# EAGLE board main (EAGLE 9.0.1)
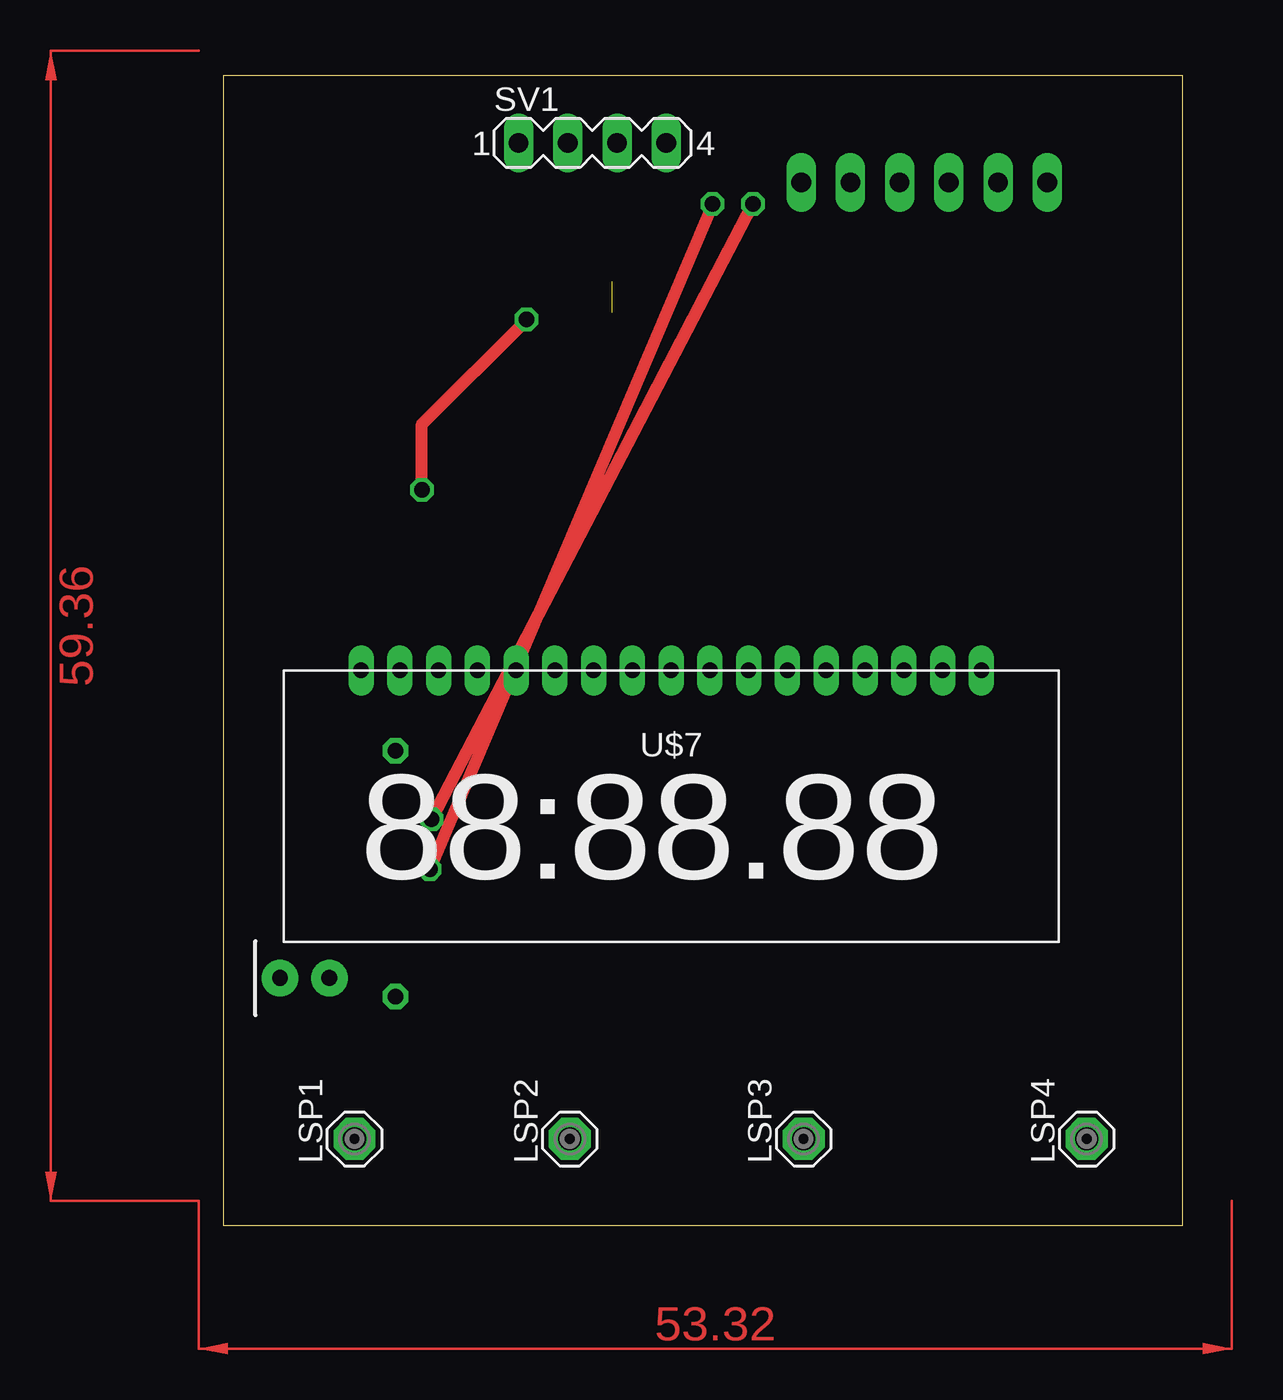
[diagram p0: board, top side]
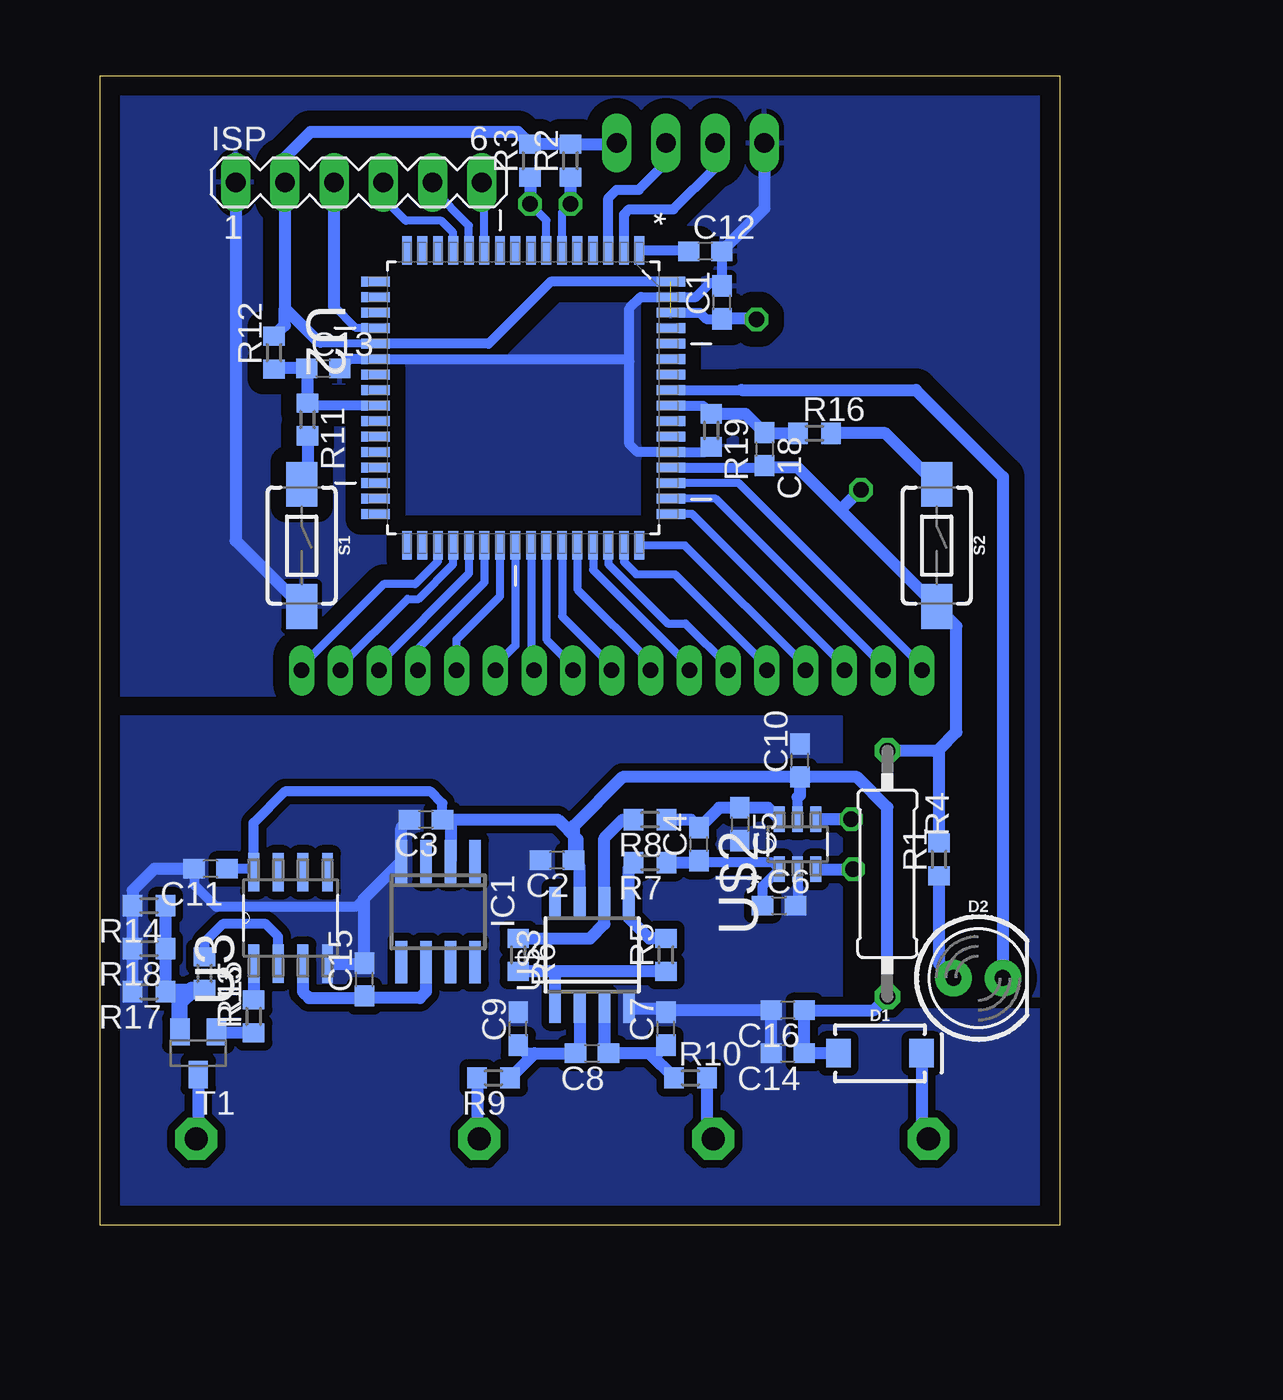
[diagram p1: board, bottom side, seen from below]

Size 49.51 x 59.36 mm. Coordinates in mm from the lower left corner, seen from the top.
Outline: 0,0 49.51,0 49.51,59.36 0,59.36 0,0
Copper layers (1*16): Top 0.035mm / dielectric 1.5mm / Bottom 0.035mm
Design rules "default *": minimum track width 16mil, minimum drill 0.35mm, track to track 10mil, track to pad 10mil, pad to pad 10mil, via to via 10mil, smd to smd 10mil, copper to edge 40mil, drill to drill 6mil, minimum pad ring 10mil, minimum via ring 8mil, stop-mask expansion 4mil, vias tented up to drill 0mil, thermal gap 10mil

## Footprints (pad centres in the part's own frame; a part is rotated, then mirrored left to right if it is on the bottom)
C0603 = smd 1.1 x 1: 1 -0.85,0; 2 0.85,0
SMA-DIODE = smd 1.27 x 1.47: A -2.15,0; C 2.15,0
LED_5MM = drill 0.813 pad 1.88: A -1.27,0; K 1.27,0
SOIC8 = smd 0.6 x 2.2: 1 -1.905,-2.6; 2 -0.635,-2.6; 3 0.635,-2.6; 4 1.905,-2.6; 5 1.905,2.6; 6 0.635,2.6; 7 -0.635,2.6; 8 -1.905,2.6
MA06-1 = drill 1.016 long: 1 -6.35,0; 2 -3.81,0; 3 -1.27,0; 4 1.27,0; 5 3.81,0; 6 6.35,0
MCS08 = drill 1.194 pad 2.159 octagon: MP 0,0
R0603 = smd 1 x 1.1: 1 -0.85,0; 2 0.85,0
0309/12 = drill 0.813 octagon: 1 -6.35,0; 2 6.35,0
TACTILE_SWITCH_SMD_6.0X3.5MM = smd 2.3 x 1.6: 1 -3.15,0; 2 3.15,0
MA04-1 = drill 1.016 long: 1 -3.81,0; 2 -1.27,0; 3 1.27,0; 4 3.81,0
SOT23-BEC = smd 1 x 1.4: B -0.95,-1.1; C 0,1.1; E 0.95,-1.1
QFP80P1600X1600X120-64N = smd 1.473 x 0.508: 1 -7.62,5.994; 2 -7.62,5.207; 3 -7.62,4.394; 4 -7.62,3.607; 5 -7.62,2.794; 6 -7.62,2.007; 7 -7.62,1.194; 8 -7.62,0.406; 9 -7.62,-0.406; 10 -7.62,-1.194; 11 -7.62,-2.007; 12 -7.62,-2.794; 13 -7.62,-3.607; 14 -7.62,-4.394; 15 -7.62,-5.207; 16 -7.62,-5.994; 33 7.62,-5.994; 34 7.62,-5.207; 35 7.62,-4.394; 36 7.62,-3.607; 37 7.62,-2.794; 38 7.62,-2.007; 39 7.62,-1.194; 40 7.62,-0.406; 41 7.62,0.406; 42 7.62,1.194; 43 7.62,2.007; 44 7.62,2.794; 45 7.62,3.607; 46 7.62,4.394; 47 7.62,5.207; 48 7.62,5.994 | smd 0.508 x 1.473: 17 -5.994,-7.62; 18 -5.207,-7.62; 19 -4.394,-7.62; 20 -3.607,-7.62; 21 -2.794,-7.62; 22 -2.007,-7.62; 23 -1.194,-7.62; 24 -0.406,-7.62; 25 0.406,-7.62; 26 1.194,-7.62; 27 2.007,-7.62; 28 2.794,-7.62; 29 3.607,-7.62; 30 4.394,-7.62; 31 5.207,-7.62; 32 5.994,-7.62; 49 5.994,7.62; 50 5.207,7.62; 51 4.394,7.62; 52 3.607,7.62; 53 2.794,7.62; 54 2.007,7.62; 55 1.194,7.62; 56 0.406,7.62; 57 -0.406,7.62; 58 -1.194,7.62; 59 -2.007,7.62; 60 -2.794,7.62; 61 -3.607,7.62; 62 -4.394,7.62; 63 -5.207,7.62; 64 -5.994,7.62
SOIC127P600X175-8N = smd 1.981 x 0.559: 1 -2.362,1.905; 2 -2.362,0.635; 3 -2.362,-0.635; 4 -2.362,-1.905; 5 2.362,-1.905; 6 2.362,-0.635; 7 2.362,0.635; 8 2.362,1.905
SOT95P270X145-6N = smd 1.321 x 0.559: 1 -1.295,0.94; 2 -1.295,0; 3 -1.295,-0.94; 4 1.295,-0.94; 5 1.295,0; 6 1.295,0.94
SOIC8' = smd 0.6 x 1.5: 1 -1.905,-2.75; 2 -0.635,-2.75; 3 0.635,-2.75; 4 1.905,-2.75; 5 1.905,2.75; 6 0.635,2.75; 7 -0.635,2.75; 8 -1.905,2.75
GDC0570_LCD = drill 0.8 long: P$1 -16,0; P$2 -14,0; P$3 -12,0; P$4 -10,0; P$5 -8,0; P$6 -6,0; P$7 -4,0; P$8 -2,0; P$9 0,0; P$10 2,0; P$11 4,0; P$12 6,0; P$13 8,0; P$14 10,0; P$15 12,0; P$16 14,0; P$17 16,0

## Placement (x,y rotation side)
C1  100n  [C0603]  17.42,47.65 90 bottom
C2  100n  [C0603]  25.93,18.86 180 bottom
C3  100n  [C0603]  32.7,20.96 180 bottom
C4  1u  [C0603]  18.61,19.68 90 bottom
C5  1u  [C0603]  16.51,20.71 270 bottom
C6  100n  [C0603]  14.48,16.51 0 bottom
C7  10n  [C0603]  20.32,10.16 90 bottom
C8  100n  [C0603]  24.13,8.89 180 bottom
C9  10n  [C0603]  27.94,10.16 90 bottom
C10  1u  [C0603]  13.4,24 90 bottom
C11  100n  [C0603]  43.82,18.42 180 bottom
C12  1u  [C0603]  18.29,50.29 0 bottom
C13  100n  [C0603]  38,44.25 0 bottom
C14  1u  [C0603]  14.03,8.89 180 bottom
C15  1u  [C0603]  35.88,12.7 90 bottom
C16  100n  [C0603]  14.03,11.11 180 bottom
C18  100n  [C0603]  15.24,40.08 270 bottom
D1  1A/40V/500mV  [SMA-DIODE]  9.27,8.89 0 bottom
D2  [LED_5MM]  4.2,12.78 0 bottom
IC1  LT1019S-2.5  [SOIC8]  32.07,16.19 180 bottom
ISP  [MA06-1]  36.17,53.85 0 bottom
LSP1  MCS08  [MCS08]  6.77,4.47 90 top
LSP2  MCS08  [MCS08]  17.88,4.47 90 top
LSP3  MCS08  [MCS08]  29.95,4.47 90 top
LSP4  MCS08  [MCS08]  44.55,4.47 90 top
R1  470  [R0603]  6.22,18.9 90 bottom
R2  4.7k  [R0603]  25.25,54.97 90 bottom
R3  4.7k  [R0603]  27.33,54.97 90 bottom
R4  0  [0309/12]  8.89,18.16 270 bottom
R5  18k  [R0603]  20.32,13.97 90 bottom
R6  2k  [R0603]  27.94,13.97 270 bottom
R7  20k  [R0603]  21.15,18.73 180 bottom
R8  20k  [R0603]  21.15,20.96 180 bottom
R9  1k  [R0603]  29.21,7.62 180 bottom
R10  1k  [R0603]  19.05,7.62 0 bottom
R11  1k  [R0603]  38.81,41.61 270 bottom
R12  10k  [R0603]  40.54,45.06 90 bottom
R13  1k  [R0603]  41.59,10.79 90 bottom
R14  100  [R0603]  46.99,16.51 180 bottom
R15  1k  [R0603]  44.13,13.02 270 bottom
R16  1k  [R0603]  12.65,40.89 0 bottom
R17  100  [R0603]  46.99,12.07 180 bottom
R18  100  [R0603]  46.99,14.29 180 bottom
R19  10k  [R0603]  17.98,41.05 270 bottom
S1  MOMENTARY-SWITCH-SPST-SMD-6.0X3.5MM  [TACTILE_SWITCH_SMD_6.0X3.5MM]  39.12,35.1 270 bottom
S2  MOMENTARY-SWITCH-SPST-SMD-6.0X3.5MM  [TACTILE_SWITCH_SMD_6.0X3.5MM]  6.35,35.1 270 bottom
SV1  [MA04-1]  19.05,55.88 0 top
T1  [SOT23-BEC]  44.45,8.89 180 bottom
U2  ATMEGA169P-16AU  [QFP80P1600X1600X120-64N]  27.69,42.72 270 bottom
U3  MCP6V02-E/SN  [SOIC127P600X175-8N]  39.69,15.88 90 bottom
U$2  MCP3421A0T-E/CH  [SOT95P270X145-6N]  13.53,19.68 90 bottom
U$3  MCP6N11  [SOIC8']  24.13,13.97 0 bottom
U$7  GDC0570_LCD  [GDC0570_LCD]  23.11,28.65 180 top

## Library data of the parts
C1-C16 C18 = rcl; SPICEPREFIX: C
D1 = SparkFun-DiscreteSemi; PROD_ID: DIO-08053
D2 = SparkFun-LED
IC1 = linear-technology; MPN: LT1019CS8-2.5#PBF; OC_FARNELL: 9559426; OC_NEWARK: 57M0929
ISP SV1 = con-lstb; OC_FARNELL: unknown; OC_NEWARK: unknown
LSP1-LSP4 = solpad
R1-R19 = rcl; SPICEPREFIX: R
S1 S2 = SparkFun-Switches; PROD_ID: SWCH-00815; SF_SKU: COM-08229
T1 = DC_LOAD_AU
U2 = 7_segment_lib; MPN: ATMEGA169P-16AU; OC_FARNELL: 1675975; OC_NEWARK: 33P6478; PACKAGE: TQFP-64; SUPPLIER: Atmel
U3 = Microchip_By_element14_Batch_1; MPN: MCP6V02-E/SN; OC_FARNELL: 1629346; OC_NEWARK: 27M0220; PACKAGE: SOIC-8; SUPPLIER: Microchip
U$2 = Microchip_By_element14_Batch_1; MPN: MCP3421A0T-E/CH; OC_FARNELL: 1605567; OC_NEWARK: 77M2561; PACKAGE: SOT-6; SUPPLIER: Microchip
U$3 U$7 = 7_segment_lib

## Nets
1: U2.47 U$7.P$13
2: U2.46 U$7.P$12
3: U2.45 U$7.P$11
4: U2.44 U$7.P$10
5: U2.43 U$7.P$9
6: U2.42 U$7.P$8
7: U2.41 U$7.P$7
8: U2.40 U$7.P$6
9: U2.39 U$7.P$5
10: U2.38 U$7.P$4
11: U2.37 U$7.P$3
12: U2.36 U$7.P$2
13: U2.35 U$7.P$1
ADCIN+: C4.1 C6.1 R7.1 U$2.1
ADCIN-: C4.2 C5.1 R8.1 U$2.6
B2: C18.1 R16.1 R19.1 U2.56
COM1: U2.51 U$7.P$17
COM2: U2.50 U$7.P$16
COM3: U2.49 U$7.P$15
COM4: U2.48 U$7.P$14
GND: C1.2 C12.2 C13.2 ISP.1 R19.2 S1.2 SV1.1 U2.22 U2.53 U2.63
GNDA: C2.2 C3.2 C5.2 C6.2 C7.2 C9.2 C10.2 C11.2 C14.2 C15.2 C16.2 IC1.4 R14.2 R17.2 R18.2 U3.4 U$2.2 U$3.4
HOLD: C13.1 R11.1 R12.1 U2.25
LCDCAP: C12.1 U2.1
LED: D2.K U2.57
MISO: ISP.4 U2.13
MOSI: ISP.5 U2.12
N1: R11.2 S1.1
N2: R16.2 S2.1
N$2: C15.1 IC1.6 U3.3
N$3: R14.1 R15.2 R17.1 R18.1 T1.E
N$4: C8.2 C9.1 R9.1 U$3.2
N$5: C7.1 C8.1 R10.1 U$3.3
N$6: D2.A R1.1
N$7: R13.2 U3.1
N$8: R13.1 T1.B
N$9: R15.1 U3.2
PB0: U2.10
PB4: U2.14
PB5: U2.15
PB6: U2.16
PB7: U2.17
PD1: U2.26
PD2: U2.27
PD3: U2.28
PD4: U2.29
PD5: U2.30
PD6: U2.31
PD7: U2.32
PE2: U2.4
PE3: U2.5
PE6: U2.8
PE7: U2.9
PF0: U2.61
PF1: U2.60
PF2: U2.59
PF3: U2.58
PF6: U2.55
PF7: U2.54
PG0: U2.33
PG1: U2.34
PG3: U2.18
PG4: U2.19
RESET: ISP.3 U2.20
RX: SV1.2 U2.2
S+: LSP2.MP R10.2
S-: LSP3.MP R9.2
SCK: ISP.6 U2.11
SCL: R2.1 U2.6 U$2.3
SDA: R3.1 U2.7 U$2.4
TX: SV1.3 U2.3
V+: D1.C LSP1.MP
V-: LSP4.MP T1.C
VCC: C1.1 C18.2 ISP.2 R1.2 R2.2 R3.2 R4.1 R12.2 S2.2 SV1.4 U2.21 U2.52 U2.62 U2.64
VCCA: C2.1 C3.1 C10.1 C11.1 C14.1 C16.1 D1.A IC1.2 R4.2 U3.8 U$2.5 U$3.7
VFG: R5.1 R6.2 U$3.1
VOUT: R6.1 R8.2 U$3.6
VREF: R5.2 R7.2 U$3.5

## Tracks (layer width: path | path; a pad name or v marks a point on that pad's centre or on a via)
1
  Bottom 0.406: U2.47 22.48,34.25 21.85,33.62 19.86,33.62 15.11,28.88 U$7.P$13
2
  Bottom 0.406: U2.46 23.29,34.13 20.24,31.08 19.31,31.08 17.11,28.88 U$7.P$12
3
  Bottom 0.406: U2.45 24.08,33.84 19.11,28.88 U$7.P$11
4
  Bottom 0.406: U2.44 24.89,32.83 21.11,29.06 U$7.P$10
5
  Bottom 0.406: U2.43 25.68,31.44 23.11,28.88 U$7.P$9
6
  Bottom 0.406: U2.42 26.49,30.25 25.11,28.88 U$7.P$8
7
  Bottom 0.406: U2.41 27.28,28.82 U$7.P$7
8
  Bottom 0.406: U2.40 28.09,29.93 29.38,28.65 U$7.P$6
9
  Bottom 0.406: U$7.P$5 31.11,30.25 28.88,32.49 U2.39
10
  Bottom 0.406: U2.38 29.69,33.19 33.11,29.77 U$7.P$4
11
  Bottom 0.406: U2.37 30.48,33.66 35.11,29.02 U$7.P$3
12
  Bottom 0.406: U$7.P$2 37.11,28.88 33.65,32.34 33.08,32.34 31.29,34.13 U2.36
13
  Bottom 0.406: U2.35 32.08,34.28 33.26,33.1 34.89,33.1 39.11,28.88 U$7.P$1
ADCIN+
  Bottom 0.508: 18.92,18.73 14.81,18.73 U$2.1 15.33,17.53 C6.1
  Bottom 0.61: R7.1 18.92,18.73 18.71,18.73 C4.1
ADCIN-
  Bottom 0.508: U$2.6 14.49,20.96
  Bottom 0.61: 20.35,21.01 R8.1 19.03,20.96 C4.2 17.58,21.56 C5.1 15.05,21.56 U$2.6
B2
  Bottom 0.508: U2.56 18.4,42.32 R19.1
  Bottom 0.61: R16.1 15.2,40.89 C18.1 16.21,41.9 R19.1
COM1
  Bottom 0.406: U$7.P$17 7.11,28.88 16.57,38.33 U2.51
COM2
  Bottom 0.406: U$7.P$16 9.11,28.88 17.75,37.52 U2.50
COM3
  Bottom 0.406: U$7.P$15 11.11,28.88 18.97,36.73 U2.49
COM4
  Bottom 0.406: U$7.P$14 13.11,28.88 19.34,35.1 U2.48
GND
  Bottom 0.508: C13.2 36.67,44.73 U2.22 22.33,44.73 22.2,44.6 | R19.2 18.3,39.93 U2.53 21.79,39.93 22.2,40.34 22.2,44.6 | 22.2,44.6 22.2,47.35 21.62,47.93 U2.63 18.77,47.93 18.03,48.67 17.59,48.67 17.44,48.51 | C12.2 17.44,48.51 | 17.44,48.51 C1.2
  Bottom 0.61: 42.52,55.12 ISP.1 42.52,35.36 S1.2 | SV1.1 15.24,52.49 C12.2
  pour Bottom (isolate 0.813): -1.27,60.6 52.07,60.6 52.07,27.33 8.26,27.33 8.26,11.91 -1.27,11.79
GNDA
  Bottom 0.508: C6.2 13.53,16.61 U$2.2 | C11.2 44.67,17.59 43.54,16.46 36.31,16.46 35.92,16.85
  Bottom 0.61: U3.4 35.92,13.51 | 35.92,13.51 C15.2 | 35.92,13.51 35.92,16.85 IC1.4 33.97,20.54 C3.2 | R17.2 R18.2 R14.2 47.84,17.29 46.71,18.42 C11.2 | U$3.4 20.53,11.22 | 20.53,11.22 C7.2 | C14.2 C16.2 20.42,11.11 20.53,11.22
  pour Bottom (isolate 0.406, no thermals): 52.02,26.29 52.02,0 -1.27,0 -1.27,11.18 11.23,11.18 11.23,26.29
HOLD
  Bottom 0.508: U2.25 38.67,42.32 R11.1
  Bottom 0.61: R12.1 40.5,44.25 C13.1 38.81,44.21 R11.1
LCDCAP
  Bottom 0.508: U2.1 19.19,50.34 C12.1
LED
  Bottom 0.508: U2.57 16.41,43.13
  Bottom 0.61: D2.K 2.93,38.65 7.42,43.13 16.41,43.13
MISO
  Bottom 0.406: U2.13 31.29,51.26 31.9,51.87 33.73,51.87 34.9,53.04 ISP.4
MOSI
  Bottom 0.406: U2.12 30.48,51.61 32.36,53.49 ISP.5
N1
  Bottom 0.61: R11.2 38.81,38.56 S1.1
N2
  Bottom 0.61: S2.1 8.99,40.89 R16.2
N$2
  Bottom 0.61: U3.3 39.05,12.07 38.73,11.75 35.98,11.75 C15.1 35.78,11.75 33.02,11.75 32.7,12.07 IC1.6
N$3
  Bottom 0.61: R15.2 44.77,12.17 46.04,12.17 R17.1 R18.1 R14.1
  Bottom 0.813: T1.E 45.4,11.54 44.77,12.17
N$4
  Bottom 0.61: U$3.2 24.77,9.11 C8.2 27.09,8.89 | R9.1 27.09,8.89 | C9.1 27.52,8.89 27.09,8.89
N$5
  Bottom 0.61: R10.1 21.17,8.89 | 21.17,8.89 C8.1 23.5,9.11 U$3.3 | C7.1 20.74,8.89 21.17,8.89
N$6
  Bottom 0.61: D2.A 6.22,13.53 R1.1
N$7
  Bottom 0.61: U3.1 R13.2
N$8
  Bottom 0.61: R13.1 43.46,9.95 T1.B
N$9
  Bottom 0.508: U3.2 40.32,14.92 40.96,15.56 43.18,15.56 44.13,14.61 R15.1
RESET
  Bottom 0.406: U2.20 36.32,46.33 37.44,47.45
  Bottom 0.61: 37.44,47.45 ISP.3
RX
  Bottom 0.508: U2.2 22.48,52.2 22.23,52.45 19.94,52.45 17.78,54.61 SV1.2
S+
  Bottom 0.61: R10.2 18.2,4.79 LSP2.MP
S-
  Bottom 0.61: R9.2 30.06,4.58 LSP3.MP
SCK
  Bottom 0.406: U2.11 29.69,53.72 ISP.6
SCL  (via drill 0.8)
  Top 0.61: v25.25,52.73 v10.66,18.39
  Bottom 0.406: U2.6 25.68,52.3 v25.25,52.73
  Bottom 0.61: U$2.3 11.06,18.39 10.81,18.64 10.66,18.49 v10.66,18.39 | R2.1 v25.25,52.73
SDA  (via drill 0.8)
  Top 0.61: v10.76,20.98 v27.33,52.73
  Bottom 0.406: U2.7 26.49,51.89 v27.33,52.73
  Bottom 0.61: U$2.4 v10.76,20.98 | R3.1 v27.33,52.73
TX
  Bottom 0.508: SV1.3 20.32,54.86 21.72,53.47 22.86,53.47 23.29,53.04 U2.3
V+
  Bottom 0.61: D1.C 7.12,4.82 LSP1.MP
V-
  Bottom 0.61: T1.C 44.45,4.57 LSP4.MP
VCC  (via drill 0.8)  (1 unrouted)
  Top 0.61: v10.25,37.97 10.25,41.37 v15.65,46.77
  Bottom 0.406: U2.21 38.15,45.52 38.3,45.67
  Bottom 0.508: 20.09,47.09 U2.62 18.57,47.12 18.24,46.79 17.44,46.79 C1.1 | U2.52 15.36,39.12 C18.2 | U2.64 26.26,48.72 29.46,45.52 U2.21
  Bottom 0.61: 39.98,47.35 ISP.2 40.03,53.9 40.03,55.07 38.66,56.44 27.95,56.44 R3.2 R2.2 22.92,55.82 SV1.4 | 38.3,45.67 39.98,47.35 | R12.2 39.98,46.47 39.98,47.35 | 11.33,36.93 S2.2 5.33,30.94 5.33,25.46 6.22,24.57 | 11.33,36.93 13.51,39.12 15.36,39.12 | R1.2 6.22,24.57 | R4.1 6.29,24.51 6.22,24.57 | 11.33,36.93 10.29,37.97 v10.25,37.97 | v15.65,46.77 15.68,46.8 C1.1
VCCA
  Bottom 0.508: C11.1 41.77,18.42 U3.8 41.59,20.79 39.98,22.4 32.46,22.4 31.85,21.79 C3.1 | U$2.5 13.53,22.1
  Bottom 0.61: IC1.2 31.43,20.92 31.81,20.92 C3.1 25.91,20.96 24.89,19.94 24.89,18.67 24.77,18.54 | D1.A C14.1 C16.1 9.59,11.11 R4.2 8.89,21.59 10.45,23.15 C10.1 | U$3.7 24.77,18.54 | 24.77,18.54 C2.1 25.08,20.64 22.57,23.15 C10.1 | 13.53,22.1 13.4,22.22 C10.1
VFG
  Bottom 0.61: R5.1 26.04,13.12 | 26.04,13.12 R6.2 | U$3.1 26.04,13.12
VOUT
  Bottom 0.61: R6.1 24.23,14.82 23.5,15.56 U$3.6 23.5,20 22.54,20.96 R8.2
VREF
  Bottom 0.61: R5.2 21.17,14.82 21.75,15.4 22.23,15.88 U$3.5 22.23,18.5 R7.2
(copper drawn outside any net)
  shapes: Top area x2